# Altium PCB Docking Station.PcbDoc
Units mm, origin at the board's own origin, x right, y up, seen from the top; angles counter-clockwise.
Board outline 90 x 45 mm, 2 copper layers (Top Layer, Bottom Layer); 45 components, 28 nets, 120 pads, 21 vias.
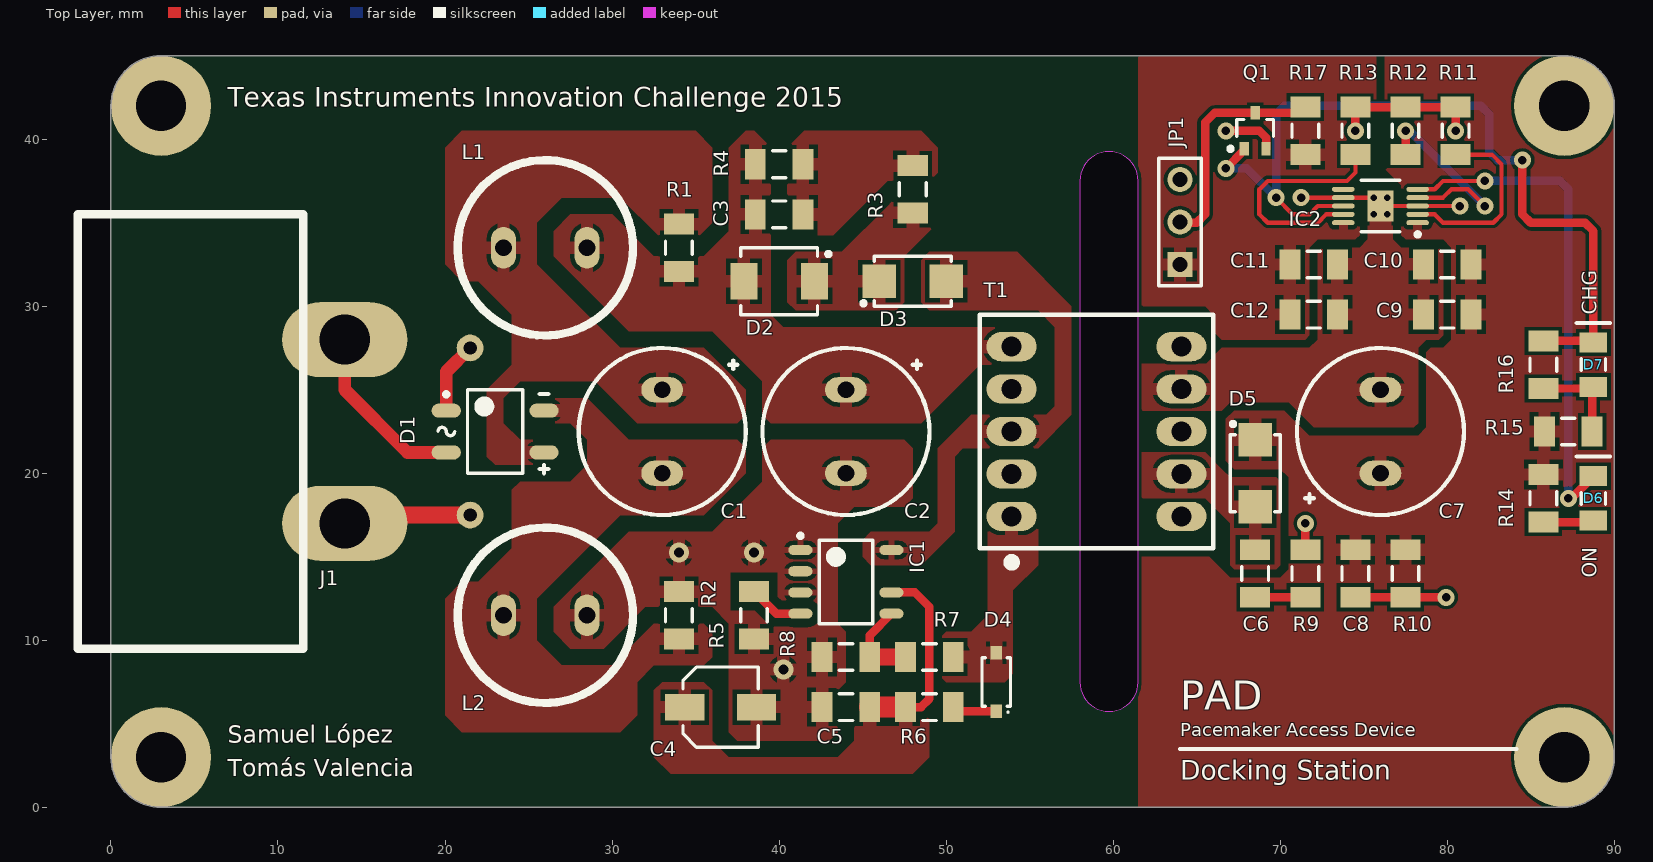
[diagram p0: Top Layer view]
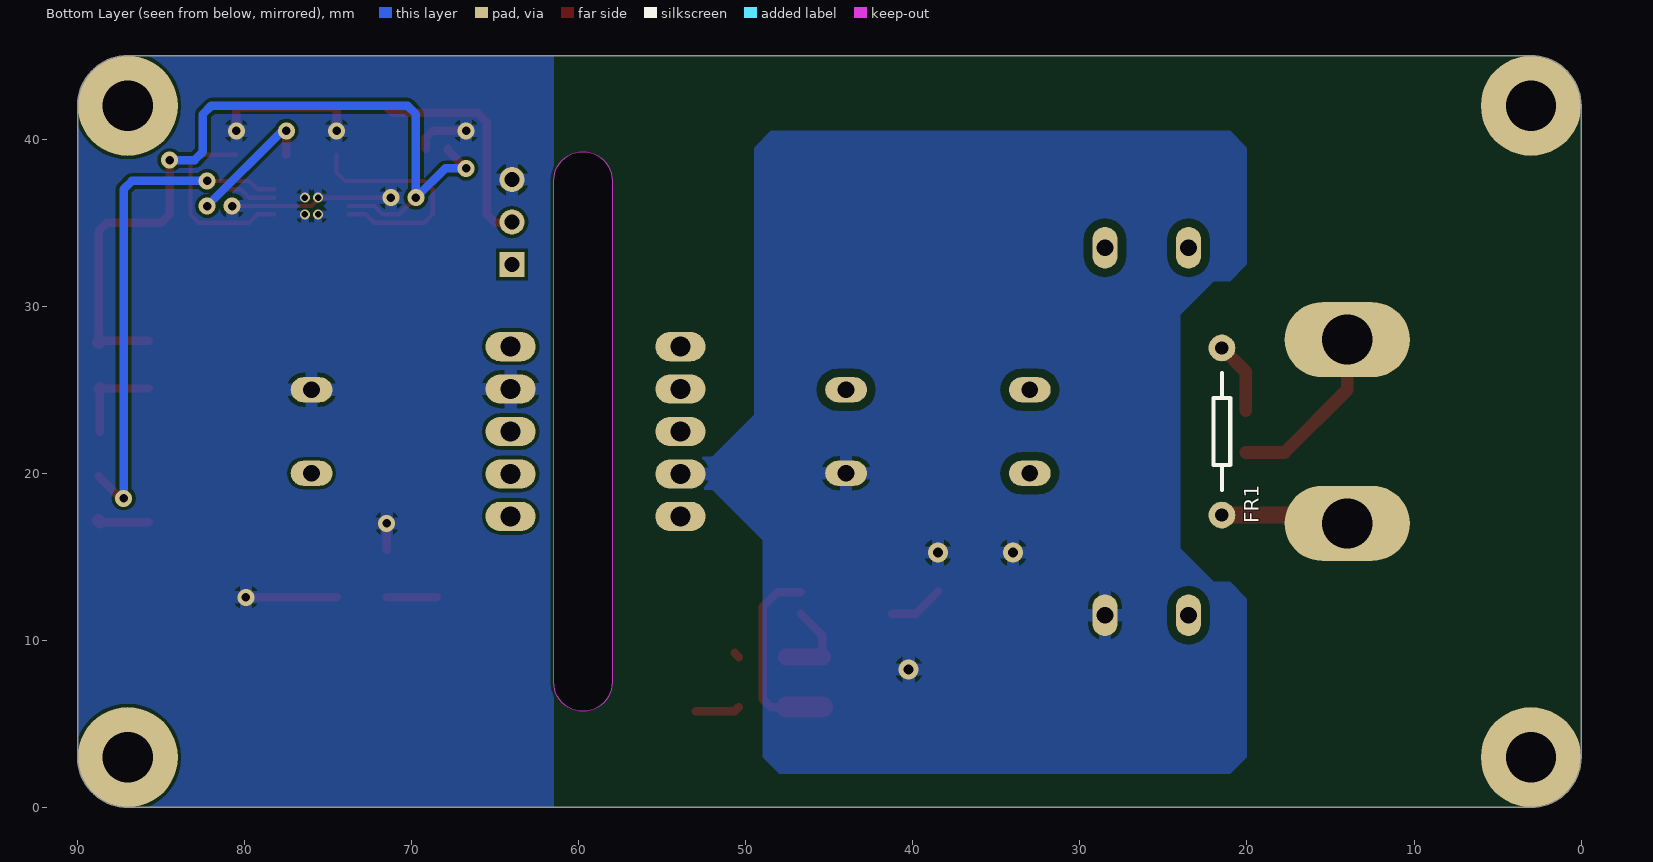
[diagram p1: Bottom Layer view, seen from below]

## Layer stack, top to bottom
Top Solder: solder mask 0.0102, Solder Resist, Dk 3.5
Top Layer: signal copper 0.0356
Dielectric 1: dielectric 0.32, FR-4, Dk 4.8
Bottom Layer: signal copper 0.0356
Bottom Solder: solder mask 0.0102, Solder Resist, Dk 3.5

## Board outline
0,3 0,42 cw(c3,42) 3,45 87,45 cw(c87,42) 90,42 90,3 cw(c87,3) 87,0 3,0 cw(c3,3)
cut-out: 58,7.5 ccw(c59.75,7.5) 61.5,7.5 61.5,37.5 ccw(c59.75,37.5) 58,37.5

## Design rules (kind name [scope] priority, off if disabled: settings)
Clearance ClearanceBattCharger [InComponent('IC2')] p1: gap=0.2
Clearance ClearancePriSide [InNetClass('Primary Side') vs InNetClass('Primary Side')] p2: gap=0.5
Clearance ClearancePolygonPriSide [InPolygon vs InNetClass('Primary Side')] p3: gap=0.5
Clearance [All] p4: gap=0.203
HoleSize [All] p1: absolutevalues=TRUE maxlimit=5 minlimit=0.3 maxpercent=80.000 minpercent=20.000
PolygonConnect PolygonConnectSecSideIC2 [InComponent('IC2')] p1: connectstyle=Relief reliefconductorwidth=0.508 reliefentries=4 polygonreliefangle="90 Angle" airgapwidth=0.254
PolygonConnect PolygonConnectPriSideIC1 [(InComponent('IC1') AND InNetClass('Primary Side'))] p2: connectstyle=Relief reliefconductorwidth=0.381 reliefentries=4 polygonreliefangle="90 Angle" airgapwidth=0.254
PolygonConnect PolygonConnectPriSide [InNetClass('Primary Side')] p3: connectstyle=Relief reliefconductorwidth=0.762 reliefentries=4 polygonreliefangle="90 Angle" airgapwidth=0.254
PolygonConnect [All] p4: connectstyle=Relief reliefconductorwidth=0.762 reliefentries=4 polygonreliefangle="90 Angle" airgapwidth=0.254
RoomDefinition "U_Battery Charger" [InComponentClass('U_Battery Charger')] p1: confinementstyle=ConfineIn formatcopy=TRUE lockcomponents=FALSE outline 62,0 90,0 90,45 62,45
RoomDefinition "U_Power Supply" [InComponentClass('U_Power Supply')] p2: confinementstyle=ConfineIn formatcopy=TRUE lockcomponents=FALSE outline 8,0 90,0 90,45 8,45
RoomDefinition "Docking Station" [InComponentClass('Docking Station')] p3: confinementstyle=ConfineIn formatcopy=TRUE lockcomponents=FALSE outline -5,0 90,0 90,45 -5,45
RoutingVias [All] p1: holewidth=0.508 width=1.016 viastyle="Through Hole" minholewidth=0.305 minwidth=0.508 maxholewidth=1.016 maxwidth=1.524
SolderMaskExpansion [All] p1: expansion=0.102
Width [All] p1: maxlimit=2.54 minlimit=0.254 preferedwidth=0.508
29 further rules are at their usual default settings.

## Classes and differential pairs
net class "Primary Side": AC_1 AC_2 AUX_OUT HVGND NetD1_1 NetD4_2 NetIC1_4 NetT1_4 PRI_ALIM PRI_DRAIN RECT_NEG RECT_POS SNUBB_CATHODE SNUBB_DIV VDD VS
component class "U_Battery Charger": C9 C10 C11 C12 D6 D7 IC2 Q1 R11 R12 R13 R14 R15 R16 R17
component class "U_Power Supply": C1 C2 C3 C4 C5 C6 C7 C8 D1 D2 D3 D4 D5 FR1 IC1 L1 L2 R1 R2 R3 R4 R5 R6 R7 R8 R9 R10 T1
component class "Docking Station": J1 JP1

## Components (designator, comment, footprint, x,y, rotation, side; value= is the part's Value field where it differs from the comment)
C1 "6.8u" CRADIAL-5mm-16mm 33,22.5 r270 top
C2 "6.8u" CRADIAL-5mm-16mm 44,22.5 r270 top
C3 "100p" C1206 40,35.5 r180 top
C4 "4.7u" CAPAE5543X54N 36.5,6 r0 top
C5 "0.1u" C1206 44,6 r0 top
C6 "2.2n" C1206 68.5,14 r90 top
C7 "1.2m" CRADIAL-5mm-20mm 76,22.5 r90 top
C8 "0.1u" C1206 74.5,14 r90 top
C9 "1u" C1206 80,29.5 r0 top
C10 "0.1u" C1206 80,32.5 r0 top
C11 "0.1u" C1206 72,32.5 r180 top
C12 "1u" C1206 72,29.5 r180 top
D1 "MB6S-E3/45" SOP250P670X290-4N 23,22.5 r0 top
D2 "SM6T150A" SMB 40,31.5 r0 top
D3 "MRA4005T3G" SMA 48,31.5 r180 top
D4 "1N4148W-7-F" SOD123 53,7.5 r270 top
D5 "B340LA-13-F" SMA 68.5,20 r90 top
D6 "ON" LED3015M 88.75,18.5 r90 top
D7 "CHG" LED3015M 88.75,26.5 r90 top
FR1 "4.7" RAXIAL-10mm-0.8mm 21.5,22.5 r90 bottom
IC1 "UCC28910" SOIC127P600X175-7N 44,13.5 r0 top
IC2 "BQ24090" TSSOP50P490X110_HS-11N 76,36 r180 top
J1 "Inlet, IEC" "Inlet, IEC - Plug" 14,22.5 r90 top
JP1 "Header 3" HDR1X3 64,32.5 r90 top
L1 "1m" INDUCTOR-5MM 26,33.5 r0 top
L2 "1m" INDUCTOR-5MM 26,11.5 r0 top
Q1 "2N7002" SOT65P210X110-3N 68.5,40.5 r90 top
R1 "6.8k" R1206 34,33.5 r270 top
R2 "6.8k" R1206 34,11.5 r90 top
R3 "2K" R1206 48,37 r90 top
R4 "100K" R1206 40,38.5 r180 top
R5 "2K" R1206 38.5,11.5 r90 top
R6 "33" R1206 49,6 r0 top
R7 "100K" R1206 49,9 r0 top
R8 "31.6K" R1206 44,9 r0 top
R9 "180" R1206 71.5,14 r270 top
R10 "15K" R1206 77.5,14 r90 top
R11 "1.2K" R1206 80.5,40.5 r270 top
R12 "2K" R1206 77.5,40.5 r270 top
R13 "10K" R1206 74.5,40.5 r270 top
R14 "1.5K" R1206 85.75,18.5 r90 top
R15 "1.5K" R1206 87.25,22.5 r180 top
R16 "100K" R1206 85.75,26.5 r270 top
R17 "100K" R1206 71.5,40.5 r270 top
T1 "WE7508110151" WE7508110151 59,22.5 r0 top

## Footprints (in the part's own frame and the unit in brackets; to place one, negate y for a bottom-side part, rotate by r counter-clockwise, add the part's x,y. Pads: shape width x height; smd on the part's side, far side on the other; paste and mask are expansions set on the pad)
C1206 [mm] "Chip Capacitor, 2-Leads, Body 3,20x1,60mm, IPC Medium Density"
  rect 1.25x1.8 smd: 1(-1.425,0) 2(1.425,0)
  silkscreen extent -0.4,-0.8 0.4,0.8, body extent -1.7,-0.9 1.7,0.9, height 0.7
CAPAE5543X54N [mm] "Aluminum Electrolytic Capacitor, Body 3,95x4,30x5,40mm, IPC Medium Density"
  rect 2.35x1.6 smd: 1(-2.15,0) 2(2.15,0)
  silkscreen extent -2.25,-2.4 2.25,2.4, body extent -2.25,-2.4 2.25,2.4, height 5.4
CRADIAL-5mm-16mm [mm]
  oval 1.5x2.5 hole 1: 1(-2.5,0) 2(2.5,0)
  silkscreen extent -5,-5 5,5, body extent -4.96,-4.99 5,4.99, height 17
CRADIAL-5mm-20mm [mm]
  oval 1.5x2.5 hole 1: 1(-2.5,0) 2(2.5,0)
  silkscreen extent -5,-5 5,5, body extent -4.96,-4.99 5,4.99, height 21
HDR1X3 [mm] "Connector; Header; 3 Position"
  rect 1.5x1.5 hole 0.9: 1(0,0)
  round 1.5 hole 0.9: 2(2.54,0) 3(5.08,0)
  silkscreen extent -1.27,-1.27 6.35,1.27
INDUCTOR-5MM [mm]
  oval 1.5x2.5 hole 1: 1(-2.5,0) 2(2.5,0)
  silkscreen extent -5.25,-5.25 5.25,5.25, body extent -5.21,-5.24 5.25,5.24, height 12
"Inlet, IEC - Plug" [mm]
  oval 4.5x7.5 hole 3: 1(-5.5,0) 2(5.5,0)
  silkscreen extent -13,2.5 13,16, body extent -14,-2.5 14,18.5, height 16
LED3015M [mm] "Chip Diode, 2-Leads, Body 3,00x1,50mm, IPC Medium Density"
  rect 1.2x1.65 smd: 1(-1.325,0) 2(1.325,0)
  silkscreen extent -0.35,-0.72 0.35,0.72, body extent -1.5,-0.75 1.5,0.75, height 0.9
R1206 [mm] "Chip Resistor, 2-Leads, Body 3,20x1,60mm, IPC Medium Density"
  rect 1.25x1.8 smd: 1(-1.425,0) 2(1.425,0)
  silkscreen extent -0.4,-0.8 0.4,0.8, body extent -1.7,-0.9 1.7,0.9, height 0.7
RAXIAL-10mm-0.8mm [mm] "Axial 3W resistor"
  round 1.6 hole 0.8: 1(-5,0) 2(5,0)
  silkscreen extent -3.5,-0.5 3.5,0.5
SMA [mm] "Molded Diode, 2-Leads, Body 4,31x2,60mm, IPC Medium Density"
  rect 2x2 smd: 1(-2,0) 2(2,0)
  silkscreen extent -2.3,-1.5 3.07,1.5, body extent -2.29,-1.46 2.28,1.46, height 2.2
SMB [mm] "SMB"
  rect 1.62x2.18 smd: 1(-2.11,0) 2(2.11,0)
  silkscreen extent -2.3,-2 3.08,2, body extent -2.3,-1.97 2.3,1.97, height 2.5
SOD123 [mm] "SODFL, 2-Leads, Body 1,55x3,70mm, IPC Medium Density"
  rect 0.8x0.7 smd: 1(-1.75,0) 2(1.75,0)
  silkscreen extent -1.45,-0.85 1.85,0.85, body extent -1.42,-0.85 1.43,0.85, height 1.45
SOIC127P600X175-7N [mm] "SOIC, 7-Leads, Body 4,90x3,90mm, Pitch 1,27mm, IPC Medium Density"
  oval 1.45x0.6 smd: 1(-2.725,1.905) 2(-2.725,0.635) 3(-2.725,-0.635) 4(-2.725,-1.905) 5(2.725,-1.905) 6(2.725,-0.635) 8(2.725,1.905)
  silkscreen extent -2.85,-2.5 1.6,2.88, body extent -2,-2.5 2,2.5, height 1.75
SOP250P670X290-4N [mm] "SOP, 4-Leads, Body 4,75x3,87mm, Pitch 2,50mm, IPC Medium Density"
  oval 1.75x0.85 smd: 1(-2.925,1.25) 2(-2.925,-1.25) 3(2.925,-1.25) 4(2.925,1.25)
  silkscreen extent -3.42,-2.5 3.17,2.5, body extent -2.05,-2.5 2.05,2.5, height 2.9
SOT65P210X110-3N [mm] "SOT23, 3-Leads, Body 2,00x2,10mm, Pitch 0,65mm, IPC Medium Density"
  rect 0.8x0.55 smd: 1(-1.075,0.65) 2(-1.075,-0.65) 3(1.075,0)
  silkscreen extent -1.2,-1.1 0.67,1.6, body extent -0.67,-1.1 0.67,1.1, height 1.1
TSSOP50P490X110_HS-11N [mm] "TSSOP, 10-Leads, Body 3,00x3,00mm, Pitch 0,50mm, Thermal Pad 1,88x1,57mm, IPC Medium Density"
  oval 1.35x0.3 smd: 1(-2.225,1) 2(-2.225,0.5) 3(-2.225,0) 4(-2.225,-0.5) 5(-2.225,-1) 6(2.225,-1) 7(2.225,-0.5) 8(2.225,0) 9(2.225,0.5) 10(2.225,1)
  rect 1.57x1.88 smd: Pad(0,0)
  silkscreen extent -2.35,-1.55 1.15,1.82, body extent -1.55,-1.55 1.55,1.55, height 1.1
WE7508110151 [mm]
  oval 3x1.75 hole 1.2: 1(-5.08,-5.08) 2(-5.08,-2.54) 3(-5.08,0) 4(-5.08,2.54) 5(-5.08,5.08) 6(5.08,5.08) 7(5.08,2.54) 8(5.08,0) 9(5.08,-2.54) 10(5.08,-5.08)
  silkscreen extent -6.98,-8.08 6.98,6.98, body extent -6.98,-6.98 6.98,6.98, height 12.7

## Part data
C1 C2 C4 C7: library part "Pol Capacitor", "Polarized Capacitor"
C3 C5 C6 C8 C9 C10 C11 C12: library part Capacitor, "Capacitor"
D1: "Diode, Bridge Rectifier"
D2: "Diode, Transient Voltage Suppresor, 150V, 600W"
D3: "Diode, Standard, 1A"
D4: "Diode, Switch, 300mA, 100V"
D5: "Diode, Schottky, 40V, 3A"
D6 D7: library part LED, "LED"
FR1: library part "Fuse Resistor", "Resistor, Fuse"
IC1: "700V Flyback Switcher with Constant-Voltage Constant-Current and Primary-side Control"
IC2: "Battery Charger, Single Cell Li-Ion/LiPo, 1A"
J1: library part "Inlet, IEC - Plug", "Inlet, IEC - Plug"
JP1: "Header, 3-Pin"
L1 L2: library part Inductor, "Inductor"
Q1: "Transistor, MOSFET, N-Channel, 60V, 300mA"
R1 R2 R3 R4 R5 R6 R7 R8 R9 R10 R11 R12 R13 R14 R15 R16 R17: library part Resistor, "Resistor"
T1: "Transformer, Flyback"

## Free pads (board coordinates)
  round 6 hole 3: ""(3,3) ""(3,42) ""(87,3) ""(87,42)

## Via types
v1: diameter 1.016, hole 0.508, Top Layer to Bottom Layer, 14 vias
v2: diameter 0.6, hole 0.4, Top Layer to Bottom Layer, 4 vias
v3: diameter 1.2, hole 0.6, Top Layer to Bottom Layer, 3 vias

## Nets (pads, with @x,y where several pads share a name; then routed paths per layer and width w, separated by ;. In a path a pad name is that pad's centre, name@x,y a point inside that pad or via, vN(x,y) a via of type N, cw(c..) or ccw(c..) an arc to the next point about the centre after c; other vN are vias at no path point)
5V: C7.1 C8.2 C9.2 C10.2 D5.2 IC2.1 R10.2 R14.2 R15.2
#CHG: D7.2 IC2.8 Q1.1 R16.1 | length 50.3
  Top Layer w0.254: v1(69.75,36.5) 70.75,35.5 71.75,35.5 72.25,36 IC2.8
  Top Layer w0.508: v1(66.75,38.25) 67.85,39.35 Q1.1 ; v1(84.5,38.75) 84.5,35.5 85,35 88.25,35 88.75,34.5 D7.2 ; R16.1 D7.2@88.65,27.925
  Top Layer w0.762: D7.2@88.65,27.925 D7.2
  Bottom Layer w0.508: v1(66.75,38.25) 68,38.25 v1(69.75,36.5) 69.75,41.5 70.25,42 82,42 82.5,41.5 82.5,39.25 83,38.75 v1(84.5,38.75)
AC_1: FR1.1 J1.1 | length 7.7
  Top Layer w1.016: J1.1 14.5,17.5 FR1.1
AC_2: D1.2 J1.2 | length 10.6
  Top Layer w0.762: J1.2 14,25 17.75,21.25 D1.2
AUX_OUT: D4.1 R7.2 T1.1 | length 0.4
  Top Layer w0.508: R7.2 R7.2@50.675,9.25
CHARGING: JP1.2 Q1.3 R17.1 | length 13.6
  Top Layer w0.508: JP1.2 64.04,35 65,35 65.5,35.5 65.5,41 66.075,41.575 Q1.3 71.15,41.575 R17.1
GND: C7.2 C8.1 C9.1 C10.1 C11.1 C12.1 IC2.3 IC2.7 IC2.Pad JP1.3 Q1.2 R9.1 R10.1 R11.1 R12.1 R13.1 T1.7 | length 28.8
  Top Layer w0.254: v1(71.25,36.5) IC2.7 75.5,36.5 IC2.Pad IC2.3 v1(80.75,36)
  Top Layer w0.508: v1(66.75,40.5) 68.75,40.5 69.15,40.1 Q1.2 ; R9.1 v1(71.5,17) ; C8.1 R10.1 v1(79.925,12.575) ; v1(74.5,40.5) R13.1 R12.1 R11.1 v1(80.5,40.5)
  other v2: 75.6,35.5 76.4,35.5 75.6,36.5 76.4,36.5
HVGND: C2.2 C4.2 C5.1 IC1.1 IC1.2 IC1.3 L2.2 R2.2 R5.1 R8.1 T1.2
  other v3: 40.25,8.25 34,15.25 38.5,15.25
ISET: IC2.2 R11.2 | length 11.4
  Top Layer w0.254: IC2.2 79.25,35.5 79.75,35 82.75,35 83.25,35.5 83.25,38.5 82.675,39.075 R11.2
NetD1_1: D1.1 FR1.2 | length 4.3
  Top Layer w0.762: D1.1 20.075,26.075 FR1.2
NetD4_2: D4.2 R6.2 | length 2.7
  Top Layer w0.508: R6.2 50.675,5.75 D4.2
NetD6_1: D6.1 R14.1 | length 3
  Top Layer w0.508: R14.1 D6.1@88.65,17.075
  Top Layer w0.762: D6.1@88.65,17.075 D6.1
NetD6_2: D6.2 IC2.5 | length 30
  Top Layer w0.254: IC2.5 79.25,37 79.75,37.5 v1(82.25,37.5)
  Top Layer w0.508: v1(87.25,18.5) 87.425,18.5 D6.2
  Bottom Layer w0.508: v1(82.25,37.5) 86.75,37.5 87.25,37 v1(87.25,18.5)
NetD7_1: D7.1 R15.1 R16.2 | length 5.5
  Top Layer w0.508: R16.2 D7.1@88.65,25.075 ; R15.1 D7.1@88.675,25.05
  Top Layer w0.762: D7.1@88.65,25.075 D7.1@88.675,25.05
NetIC1_4: IC1.4 R5.2 | length 3.3
  Top Layer w0.508: R5.2 39.83,11.595 IC1.4
PRE: IC2.4 R12.2 | length 12.7
  Top Layer w0.254: IC2.4 79.75,36.5 80.25,37 81.25,37 v1(82.25,36)
  Top Layer w0.508: R12.2 v1(77.5,40.5)
  Bottom Layer w0.508: v1(77.5,40.5) 77.75,40.5 v1(82.25,36)
PRI_ALIM: C2.1 C3.2 D2.1 L1.2 R1.2 R4.2 T1.5
PRI_DRAIN: D3.1 IC1.8 T1.3
RECT_NEG: C1.2 D1.4 L2.1 R2.1
RECT_POS: C1.1 D1.3 L1.1 R1.1
SEC_FILTER: C6.1 R9.2 | length 3
  Top Layer w0.508: C6.1 R9.2
SEC_OUT: C6.2 D5.1 T1.9
SNUBB_CATHODE: D2.2 D3.2 R3.1
SNUBB_DIV: C3.1 R3.2 R4.1
TS: IC2.9 R13.2 | length 14.2
  Top Layer w0.254: IC2.9 72.75,35.5 72.25,35 69.25,35 68.75,35.5 68.75,37 69.25,37.5 74,37.5 74.5,38 R13.2
VCC: C11.2 C12.2 IC2.10 JP1.1 R17.2
VDD: C4.1 C5.2 IC1.6 R6.1 | length 11.9
  Top Layer w0.508: IC1.6 48.135,12.865 49,12 49,6.5 48.5,6 R6.1
  Top Layer w1.27: C5.2 R6.1
VS: IC1.5 R7.1 R8.2 | length 5.3
  Top Layer w0.508: R8.2 45.425,10.295 IC1.5
  Top Layer w1.016: R8.2 R7.1
pads on no net: IC2.6 T1.4 T1.6 T1.8 T1.10

## Polygon pours and split planes (outlines as drawn)
5V on Top Layer "5V" (solid, pour order 20): 61.5,15 65.75,15 67,13.75 69.75,13.75 70,13.75 70.5,14.25 70.5,19.75 70,20.25 68.5,20.25 67.25,20.25 66.75,20.75 66.75,23.25 67.25,23.75 70.25,23.75 71.75,22.25 78.25,22.25 78.75,22.75 78.75,27.25 79,27.5 79.75,27.5 80.25,28 80.25,33.5 79.75,34 77.5,34 77.25,34.25 77.25,37.25 76.25,38.25 76.25,45 87,45 cw(c87,42) 90,42 90,3 cw(c87,3) 87,0 61.5,0
SEC_OUT on Top Layer "Sec_out" (solid, pour order 18): 68.5,19.75 67,19.75 66.5,20.25 65.5,21.25 61.5,21.25 61.5,18.5 65.5,18.5 67,17 67,14.5 67.25,14.25 69.25,14.25 69.75,14.25 70,14.5 70,19.5 69.75,19.75
GND on Top Layer "GND" (solid, pour order 16): 61.5,26.57 61.5,23.75 66.5,23.75 67,24.25 70.5,24.25 72,22.75 78,22.75 78.25,23 78.25,27.5 78.75,28 79.5,28 79.75,28.25 79.75,33.25 79.5,33.5 77.25,33.5 76.75,34 76.75,36.75 75.25,36.75 75.25,34 74.75,33.5 72.5,33.5 72.25,33.25 72.25,28.5 72.25,28 71.75,27.5 66.5,27.5 65.57,26.57
VCC on Top Layer "VCC" (solid, pour order 42): 61.5,30 65.5,30 66,29.5 66,28.5 66.5,28 71.5,28 71.75,28.25 71.75,33.5 72.25,34 73.75,34 74.5,34 74.75,34.25 74.75,37.25 75.75,38.25 75.75,45 61.5,45
PRI_DRAIN on Top Layer "Pri_drain" (solid, pour order 33): 52,23.5 51.5,23 51.5,22 52,21.5 55.5,21.5 57.5,23.5 57.5,30 54.25,33.25 49,33.25 48.5,32.75 48.5,30.25 49,29.75 55.5,29.75 56.5,28.75 56.5,24 56,23.5
PRI_DRAIN on Top Layer "Pri_drain" (solid, pour order 30): 49,16.5 45.5,16.5 45,16 45,15 45.5,14.5 48.5,14.5 50.5,16.5 50.5,21 51,21.5 55.5,21.5 56,22 56,23 55.5,23.5 51.5,23.5 49.5,21.5 49.5,17
HVGND on Top Layer "HVGND" (solid, pour order 27): 47.5,22 48,21.5 48,18.5 47.5,18 44.5,18 43.5,17 43.5,11 44,10.5 44,7.5 43.5,7 43.5,4.5 43,4 42,4 37.5,4 37,4.5 37,11 36,12 32,12 29.5,9.5 27.5,9.5 26.5,10.5 26.495,11.995 31,16.5 36.005,16.5 39,19.501 39,21.5 39.5,22
RECT_NEG on Top Layer "Rect_neg" (solid, pour order 25): 37.5,22 38,21.5 38,20 35.5,17.5 30.5,17.5 25.495,12.495 25.503,9.997 27,8.5 30,8.5 32.5,11 35.5,11 36,10.5 36,9 35.5,8.5 32.5,8.5 31.5,7.5 31.5,5.5 30.5,4.5 21,4.5 20,5.5 20,12.5 21,13.5 22,13.5 24,15.5 24,19 24.5,19.5 27.5,19.5 28.5,20.5 28.5,22 27.5,23 25,23 24.5,23.5 24.5,24 25,24.5 28.5,24.5 29,24 31,22
PRI_ALIM on Top Layer "Pri_alim" (solid, pour order 19): 48.5,23 52,26.5 55.25,26.5 55.5,26.75 55.5,28.5 55.25,28.75 40.25,28.75 39.5,29.5 39.5,39.5 38.5,40.5 38,40.5 37,39.5 37,34.5 35.5,33 32.5,33 30,35.5 27.5,35.5 26.5,34.5 26.5,33 31,28.5 36,28.5 39,25.5 39,23.5 39.5,23
RECT_POS on Top Layer "Rect_pos" (solid, pour order 23): 37.5,23 38,23.5 38,25 35.5,27.5 30.5,27.5 25.5,32.5 25.5,35 27,36.5 30.5,36.5 33,34 35,34 36,35 36,39.5 35,40.5 21,40.5 20,39.5 20,32.5 21,31.5 21.996,31.5 24,29.496 24,26.5 22.5,25 22.5,21 23,20.5 27.004,20.5 27.5,20.996 27.5,21.5 27,22 24.5,22 23.5,23 23.5,24.5 24.5,25.5 29,25.5 30,24.5 31.5,23
SNUBB_CATHODE on Top Layer "Snubb_cathode" (solid, pour order 22): 47,29.75 47.5,30.25 47.5,32.5 47.5,33 48.5,34 49.5,35 49.5,36 49,36.5 47,36.5 46.5,36 43.75,33.25 41,33.25 40.5,32.75 40.5,30.25 41,29.75
SNUBB_DIV on Top Layer "Snubb_div" (solid, pour order 24): 41.5,40.5 40.5,39.5 40.5,34.5 40.75,34.25 43.25,34.25 46.5,37.5 49,37.5 49.5,38 49.5,39 49.5,39.5 48.5,40.5
AUX_OUT on Top Layer "Aux_out" (solid, pour order 32): 52.5,18 53,18.5 55,18.5 55.5,18 55.5,14.5 54,13 54,10 54,8 53.5,7.5 50,7.5 49.5,8 49.5,10 50,10.5 51.5,10.5 52.5,11.5
VDD on Top Layer "VDD" (solid, pour order 28): 36,4 36,7 35.5,7.5 33,7.5 32.5,7 32.5,3 33.5,2 46.5,2 48,2 49,3 49,7 48.5,7.5 45,7.5 44.5,7 44.5,5 44.5,4 43.5,3 37,3
GND on Bottom Layer "GND" (solid, pour order 40): 61.5,0 87,0 ccw(c87,3) 90,3 90,42 ccw(c87,42) 87,45 61.5,45
HVGND on Bottom Layer "HVGND" (solid, pour order 29): 55.5,21 56,20.5 56,19.5 55.5,19 52,19 51.5,18.5 49,16 49,3 48,2 21,2 20,3 20,12.5 21,13.5 22,13.5 24,15.5 24,29.5 22,31.5 21,31.5 20,32.5 20,39.5 21,40.5 48.5,40.5 49.5,39.5 49.5,23.5 52,21

## Silkscreen, mask and mechanical layers (free items; w line width, h text height)
Top Overlay:
  lines w0.25: 64,3.5 84.15,3.5 ; 87.75,21 89.75,21 ; 87.75,29 89.75,29
  text "Texas Instruments Innovation Challenge 2015" at 7,41.545 h2
  text "PAD" at 64,5.25 h3
  text "Pacemaker Access Device" at 64,4 h1.33
  text "Samuel López" at 7,3.5 h1.75
  text "Tomás Valencia" at 7,1.5 h1.75
  text "Docking Station" at 64,1.25 h2
Mechanical 1:
  lines w0.25: 0,3 ccw(c3,3) 3,0 87,0 ccw(c87,3) 90,3 90,42 ccw(c87,42) 87,45 3,45 ccw(c3,42) 0,42 0,3 ; 58,7.5 ccw(c59.75,7.5) 61.5,7.5 61.5,37.5 ccw(c59.75,37.5) 58,37.5 58,7.5

## Dimensions
0,0 to 0,45 on Mechanical 13
0,0 to 90,0 on Mechanical 13